# Altium PCB stm32.PcbDoc
Units mil, origin at the board's own origin, x right, y up, seen from the top; angles counter-clockwise.
Board outline 1105 x 2080 mil, 2 copper layers (Top Layer, Bottom Layer); 35 components, 50 nets, 168 pads, 91 vias.
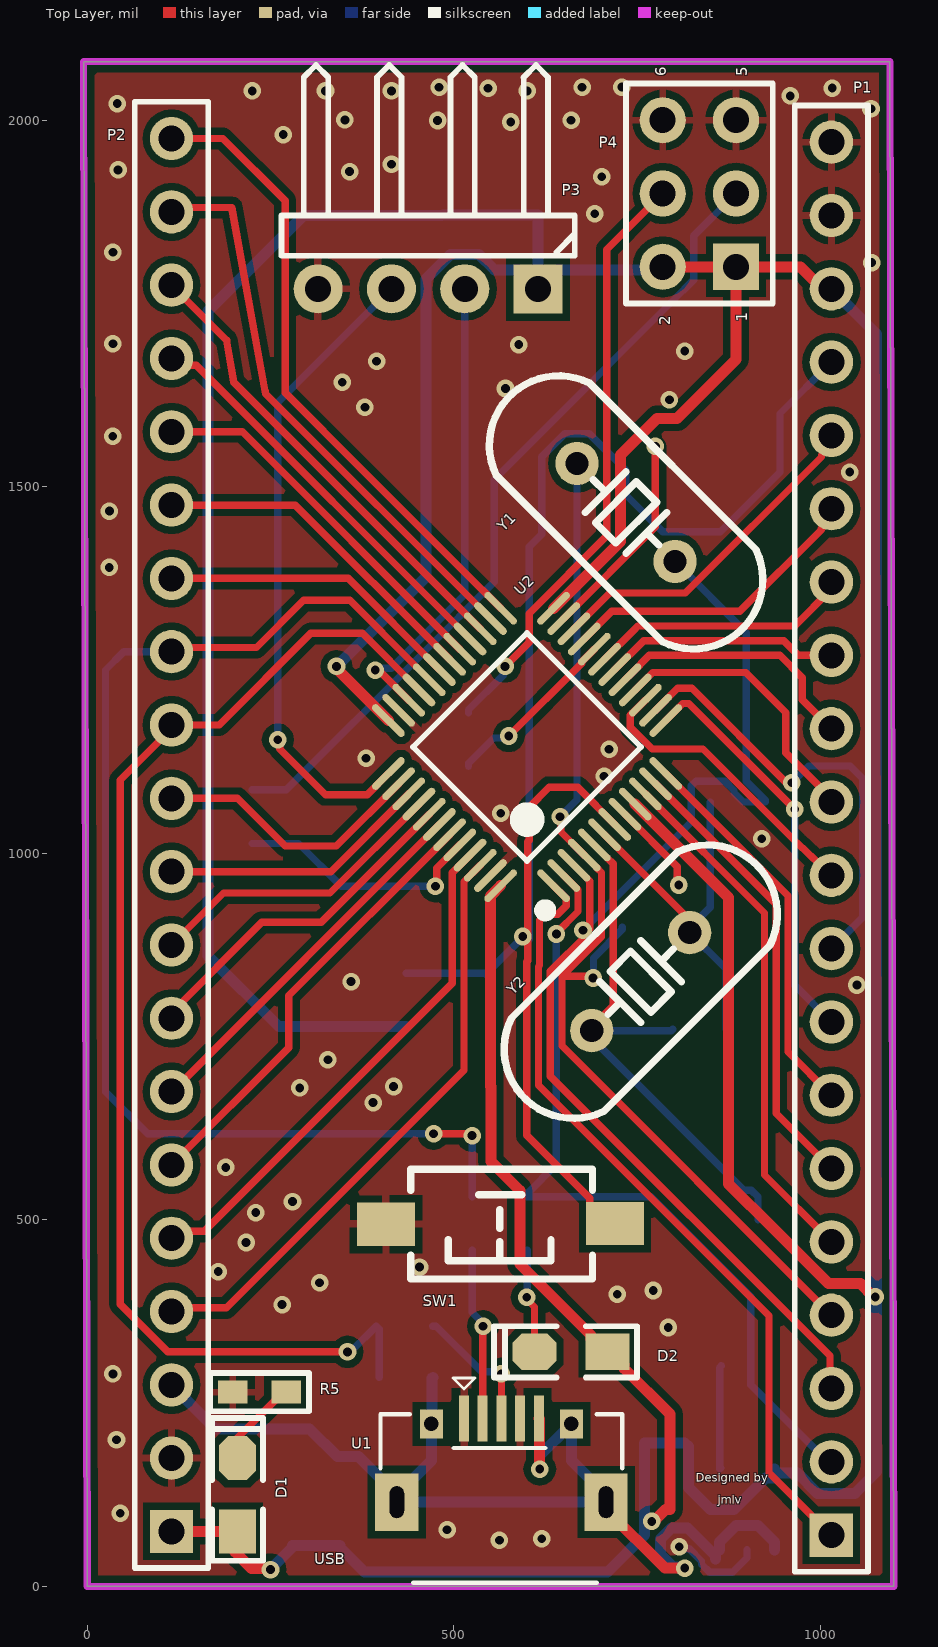
[diagram p0: Top Layer view]
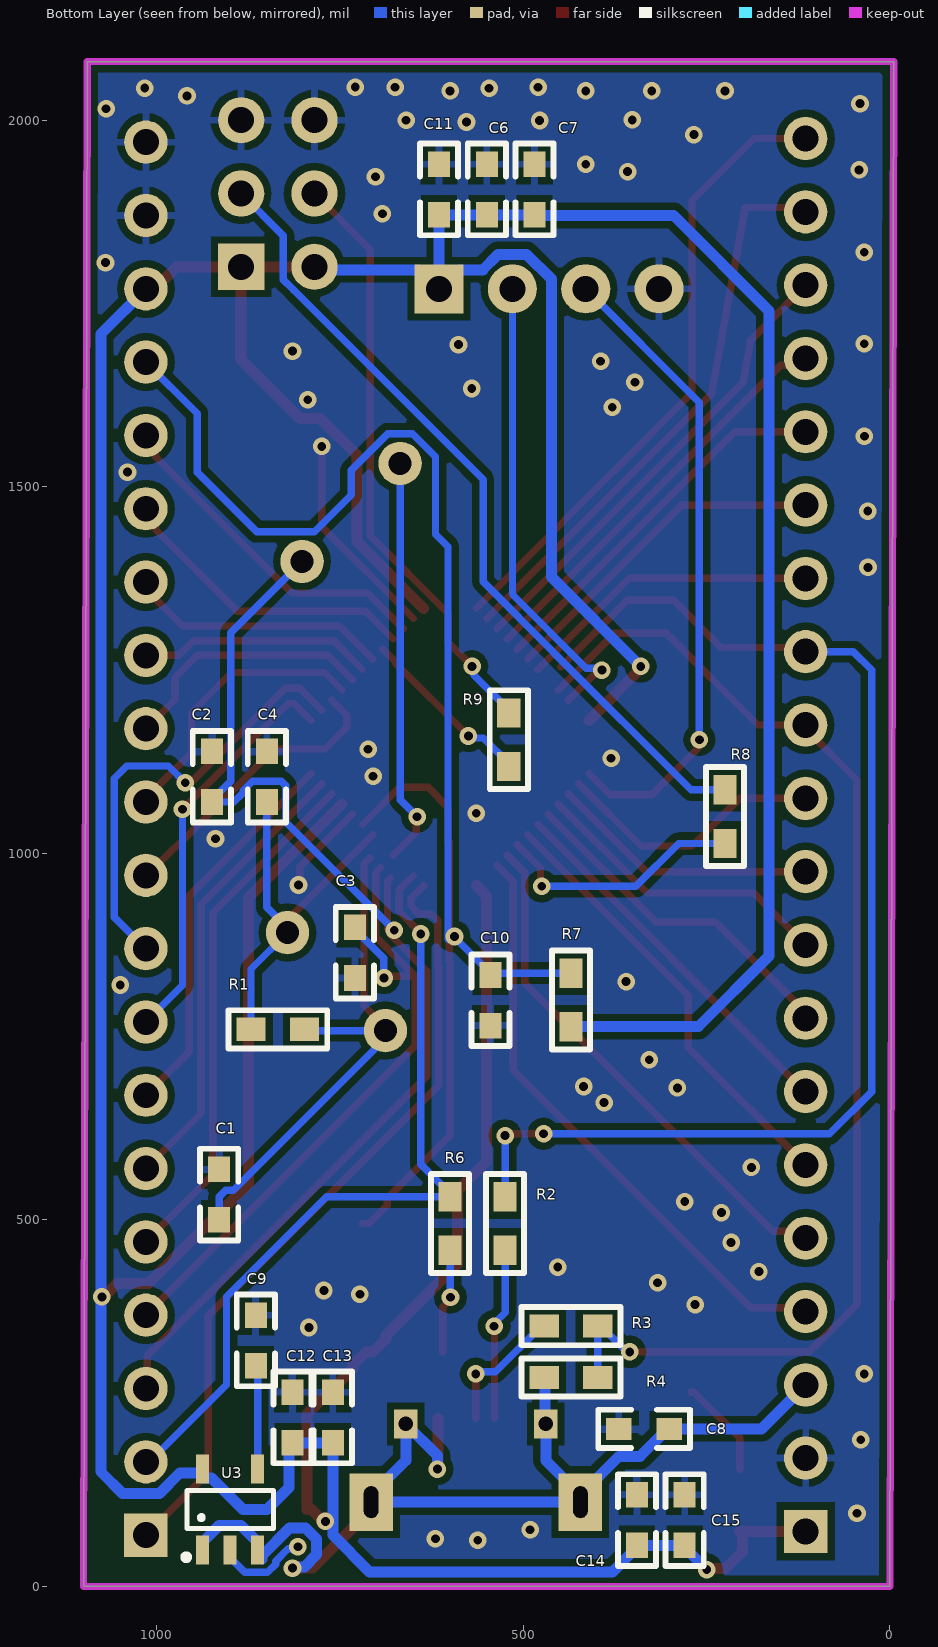
[diagram p1: Bottom Layer view, seen from below]

## Layer stack, top to bottom
Top Solder: solder mask 0.4, Solder Resist, Dk 3.5
Top Layer: signal copper 1.4
Dielectric 1: dielectric 12.6, FR-4, Dk 4.8
Bottom Layer: signal copper 1.4
Bottom Solder: solder mask 0.4, Solder Resist, Dk 3.5

## Board outline
0,0 -5,2080 1095,2080 1100,0

## Design rules (kind name [scope] priority, off if disabled: settings)
Clearance [All] p1: gap=6 ignorepadtopadclearanceinfootprint=FALSE except(10: Arc-Poly Arc-Region Track-Poly Track-Region SMDPad-Poly SMDPad-Region THPad-Poly THPad-Region Via-Poly Via-Region Fill-Region)
MinimumSolderMaskSliver [All] p1: minsoldermaskwidth=1.4
PolygonConnect [All] p1: thpad.connectstyle=Relief thpad.reliefconductorwidth=10 thpad.reliefentries=4 thpad.polygonreliefangle="90 Angle" thpad.airgapwidth=10 smdpad.connectstyle=Relief smdpad.reliefconductorwidth=10 smdpad.reliefentries=4 smdpad.polygonreliefangle="90 Angle" smdpad.airgapwidth=10 via.connectstyle=Direct via.reliefconductorwidth=10 via.reliefentries=4 via.polygonreliefangle="90 Angle" via.airgapwidth=10
RoutingVias [All] p1: holewidth=12 width=24 viastyle="Through Hole" minholewidth=6 minwidth=12 maxholewidth=24 maxwidth=50
SilkToSilkClearance [All] p1: silktosilkclearance=3
SilkToSolderMaskClearance [IsPad] p1: minsilkscreentomaskgap=1.5 clearancetoexposedcopper=TRUE
SolderMaskExpansion [All] p1: expansion=4 istentingtop=FALSE
Width [All] p1: maxlimit=20 minlimit=6 preferedwidth=10
27 further rules are at their usual default settings.

## Components (designator, comment, footprint, x,y, rotation, side; value= is the part's Value field where it differs from the comment)
C1 "22p C0603" "C 0603" 915,535 r90 bottom value=104
C2 "22p C0603" "C 0603" 925,1104 r270 bottom value=104
C3 "22p C0603" "C 0603" 730,865 r90 bottom value=104
C4 "22p C0603" "C 0603" 850,1105 r90 bottom value=104
C6 "105 C0603" "C 0603" 550,1905 r270 bottom value=104
C7 "105 C0603" "C 0603" 485,1905 r270 bottom value=104
C8 "105 C0603" "C 0603" 335,215 r180 bottom value=104
C9 "105 C0603" "C 0603" 865,335 r270 bottom value=104
C10 "105 C0603" "C 0603" 545,800 r90 bottom value=104
C11 "105 C0603" "C 0603" 615,1905 r270 bottom value=104
C12 "105 C0603" "C 0603" 815,230 r270 bottom value=104
C13 "105 C0603" "C 0603" 760,230 r270 bottom value=104
C14 "105 C0603" "C 0603" 345,90 r270 bottom value=104
C15 "105 C0603" "C 0603" 280,90 r270 bottom value=104
D1 "LED" "LED 0805G" 205,125 r90 top
D2 "LED" "LED 0805G" 660,320 r180 top
P1 "Header 20" HDR1X20 1015,70 r90 top
P2 "Header 20" HDR1X20 115,75 r90 top
P3 "SWD" HDR-1X4_H 615,1770 r180 top
P4 "Header 3X2" HDR-3X2 885,1800 r90 top
R1 "1M R0603" "R 0603" 835,760 r180 bottom
R2 "20R R0603" "R 0603" 525,495 r90 bottom
R3 "20R R0603" "R 0603" 435,355 r180 bottom
R4 "4.7K R0603" "R 0603" 435,285 r180 bottom
R5 "10K R0603" "R 0603" 235,265 r180 top
R6 "10K R0603" "R 0603" 600,495 r90 bottom
R7 "10K R0603" "R 0603" 435,800 r270 bottom
R8 "10K R0603" "R 0603" 225,1050 r90 bottom
R9 "10K R0603" "R 0603" 520,1155 r270 bottom
SW1 "SW-PB_V" "TSW SMD-3*6*2.5" 562.69,494.21 r180 top
U1 "USB-mrico" USB-micro_B 565,115 r0 top
U2 "stm32f103c8t6_48pin" "TQFP48 7x7_L" 600,1145 r45 top
U3 "RT9193" SOT23-5L 900,105 r180 bottom
Y1 "32.768K" "XTAL-49S DIP" 735,1465 r315 top
Y2 "8M" "XTAL-49S DIP" 755,825 r225 top

## Footprints (in the part's own frame and the unit in brackets; to place one, negate y for a bottom-side part, rotate by r counter-clockwise, add the part's x,y. Pads: shape width x height; smd on the part's side, far side on the other; paste and mask are expansions set on the pad)
"C 0603" [mil] "无极性贴片电容"
  rect 35x30 smd: 1(-35,0) 2(34,0)
  silkscreen extent -63,-26 62,26, body extent -31,-16 31,16, height 32
HDR1X20 [mm] "Connector; Header; 20 Position"
  rect 1.5x1.5 hole 0.9: 1(0,0)
  round 1.5 hole 0.9: 2(2.54,0) 3(5.08,0) 4(7.62,0) 5(10.16,0) 6(12.7,0) 7(15.24,0) 8(17.78,0) 9(20.32,0) 10(22.86,0) 11(25.4,0) 12(27.94,0) 13(30.48,0) 14(33.02,0) 15(35.56,0) 16(38.1,0) 17(40.64,0) 18(43.18,0) 19(45.72,0) 20(48.26,0)
  silkscreen extent -1.27,-1.27 49.53,1.27
HDR-1X4_H [mm] "弯脚排针，4脚"
  rect 1.7x1.7 hole 0.9: 1(0,0)
  round 1.7 hole 0.9: 2(2.54,0) 3(5.08,0) 4(7.62,0)
  silkscreen extent -1.27,-7.76 8.89,-1.14, body extent -1.27,-7.77 8.89,1.27, height 4.85
HDR-3X2 [mm] "双排排针，3x2脚"
  rect 1.6x1.6 hole 0.9: 1(0,0)
  round 1.6 hole 0.9: 2(0,2.54) 3(2.54,0) 4(2.54,2.54) 5(5.08,0) 6(5.08,2.54)
  silkscreen extent -1.27,-1.27 6.35,3.81, body extent -1.27,-1.27 6.35,3.81, height 8.5
"LED 0805G" [mil] "绿色0805LED"
  rect 60x50 smd: 1(-50,0)
  oct 60x50 smd: 2(50,0)
  silkscreen extent -90,-35 105,35, body extent -39,-25 39,25, height 32
"R 0603" [mil] "1/10W贴片电阻"
  rect 40x31.5 smd: 1(-36.5,0) 2(36.5,0)
  silkscreen extent -68,-26 68,26, body extent -31,-16 31,16, height 16
SOT23-5L [mm] "3x1.6x1.1mm(长宽高)"
  rect 0.45x1 smd: 1(-0.95,-1.4) 2(0,-1.4) 3(0.95,-1.4) 4(0.95,1.4) 5(-0.95,1.4)
  silkscreen extent -1.6,-1.73 1.5,0.66, body extent -1.5,-1.4 1.5,1.4, height 1.15
"TQFP48 7x7_L" [mm] "48脚，体宽：7x7mm, 脚距：0.5mm"
  oval 0.25x1.5 smd: 1(-2.75,-4.046) 2(-2.25,-4.046) 3(-1.75,-4.046) 4(-1.25,-4.046) 5(-0.75,-4.046) 6(-0.25,-4.046) 7(0.25,-4.046) 8(0.75,-4.046) 9(1.25,-4.046) 10(1.75,-4.046) 11(2.25,-4.046) 12(2.75,-4.046) 25(2.75,4.046) 26(2.25,4.046) 27(1.75,4.046) 28(1.25,4.046) 29(0.75,4.046) 30(0.25,4.046) 31(-0.25,4.046) 32(-0.75,4.046) 33(-1.25,4.046) 34(-1.75,4.046) 35(-2.25,4.046) 36(-2.75,4.046)
  oval 1.5x0.25 smd: 13(4.046,-2.75) 14(4.046,-2.25) 15(4.046,-1.75) 16(4.046,-1.25) 17(4.046,-0.75) 18(4.046,-0.25) 19(4.046,0.25) 20(4.046,0.75) 21(4.046,1.25) 22(4.046,1.75) 23(4.046,2.25) 24(4.046,2.75) 37(-4.046,2.75) 38(-4.046,2.25) 39(-4.046,1.75) 40(-4.046,1.25) 41(-4.046,0.75) 42(-4.046,0.25) 43(-4.046,-0.25) 44(-4.046,-0.75) 45(-4.046,-1.25) 46(-4.046,-1.75) 47(-4.046,-2.25) 48(-4.046,-2.75)
  silkscreen extent -3.68,-4.57 2.79,2.79, body extent -4.5,-4.5 4.5,4.5, height 1.05
"TSW SMD-3*6*2.5" [mm] "3*6*2.5mm"
  rect 2x1.5 smd: 1(-3.996,-0.02) 2(3.937,0)
  silkscreen extent -3.21,-1.9 3.09,1.9, body extent -4,-1.88 4,1.62, height 2.59
USB-micro_B [mm] "micro型USB ，5.7*7.8*2.5mm"
  rect 0.35x1.6 smd: 1(-1.3,2.9) 2(-0.65,2.9) 3(0,2.9) 4(0.65,2.9) 5(1.3,2.9)
  rect 1.5x2 hole 0.5 slot 1.1 at 90 deg: 5(-3.625,0) 5(3.625,0)
  rect 0.8x1 hole 0.5: 5(-2.425,2.71) 5(2.425,2.71)
  silkscreen extent -4.19,-2.79 4.19,4.3, body extent -4,-2.71 4,2.89, height 2.8
"XTAL-49S DIP" [mm]
  round 1.5 hole 0.8: 1(-2.4,0) 2(2.4,0)
  silkscreen extent -5.7,-2.28 5.7,2.28, body extent -5.68,-2.35 5.68,2.3, height 3.5

## Part data
C1 C2 C3 C4 C6 C7 C8 C9 C10 C11 C12 C13 C14 C15: library part Cap, LatestRevisionDate=17-Jul-2002, LatestRevisionNote="Re-released for DXP Platform.", Published=8-Jun-2000, Publisher="Altium Limited"
P1 P2: library part "Header1* 20", LatestRevisionDate=17-Jul-2002, LatestRevisionNote="Re-released for DXP Platform.", Publisher="Altium Limited"
P3: library part "Header 1*4", LatestRevisionDate=17-Jul-2002, LatestRevisionNote="Re-released for DXP Platform.", Publisher="Altium Limited"
P4: library part "Header 2*3", LatestRevisionDate=17-Jul-2002, LatestRevisionNote="Re-released for DXP Platform.", Publisher="Altium Limited"
R1 R2 R3 R4 R5 R6 R7 R8 R9: library part Res2, LatestRevisionDate=17-Jul-2002, LatestRevisionNote="Re-released for DXP Platform.", Published=8-Jun-2000, Publisher="Altium Limited"
U1: library part usb-STM
U3: library part RT9193X_5P, ICA_MFR_NAME=RICHTEK, ICA_PARTNUM=$$2191094$$RT9193-15CU5, Part Number=TMP-13
Y1 Y2: library part XTAL, LatestRevisionDate=17-Jul-2002, LatestRevisionNote="Re-released for DXP Platform.", Published=8-Jun-2000, Publisher="Altium Limited"

## Via types
v1: diameter 24, hole 12, Top Layer to Bottom Layer, 91 vias

## Nets (pads, with @x,y where several pads share a name; then routed paths per layer and width w, separated by ;. In a path a pad name is that pad's centre, name@x,y a point inside that pad or via, vN(x,y) a via of type N, cw(c..) or ccw(c..) an arc to the next point about the centre after c; other vN are vias at no path point)
5V: C8.2 P2.3 R4.1 U1.5 U3.1 U3.3 | length 1596.1
  Top Layer w15: U1.5@616.18,229.17 616.72,228.63 616.72,160.64 v1(617.27,160.09) ; U1.5@707.72,115 707.72,105.16 787.87,25 v1(815,25)
  Bottom Layer w15: P2.3@123.5,275 P2.3 175,215 C8.2 303.5,215 341.31,177.19 369.94,177.19 U1.5@422.28,124.84 ; R4.1 470.51,284.01 470.51,222.68 469.53,221.69 469.53,172.09 U1.5@422.28,124.84 ; v1(617.27,160.09) 617.27,178.49 660.47,221.69 660.47,172.09 707.72,124.84 U1.5@707.72,115 ; U1.5@729.74,84.88 707.72,106.91 U1.5@707.72,115 ; v1(815,25) 813.28,26.72 798.86,26.72 782.07,43.5 782.07,64.63 797.01,79.57 819.12,79.57 856.85,41.84 U3.3@856.85,37.7 ; U3.3 862.6,60.71 884.96,83.07 915.04,83.07 937.4,60.71 U3.1 ; U1.5@422.28,124.84 422.28,115 U1.5@707.72,115
BOOT0: R8.1 U2.44 | length 344.4
  Top Layer w10: v1(474.95,955.05) 476.76,956.85 476.76,980 U2.44
  Bottom Layer w10: R8.1 288.11,1013.5 346.56,955.05 v1(474.95,955.05)
BOOT1: R9.2 U2.20 | length 241.6
  Top Layer w10: v1(575,1160) 674.47,1259.47 674.47,1261.23 U2.20
  Bottom Layer w10: R9.2 520,1122.75 554.57,1157.32 572.32,1157.32 v1(575,1160)
GND: C1.2 C2.1 C3.1 C4.2 C6.1 C7.1 C8.1 C9.1 C10.1 C11.1 C12.1 C13.1 C14.1 C15.1 P1.19 P1.20 P2.2 P3.4 P4.5 P4.6 R5.2 SW1.2 U1.1 U1.4 U2.8 U2.23 U2.35 U2.47 U3.2 | length 541.7
  Top Layer w10: U2.23 775,1445.27 v1(775,1555) ; U2.8 805,981.76 805,958.61 v1(806.8,956.8)
  Bottom Layer w10: v1(807.57,54.07) 810.25,51.39 821.14,51.39 838,34.53 838,30.38 849.18,19.2 880.14,19.2 900,39.06 U3.2
  other v1: 562.28,62.96 620,65 490.95,77.38 45,100 40,200 35,290 792.59,353.24 265.83,384.48 723.02,398.68 772.19,403.74 316.95,414.3 178.86,429.42 453.25,435.59 216.71,469.15 230,510 280,525 189.08,571.6 390,660 290,680 417.91,682.01 328.32,718.3 1049.9,820.39 360,825 920,1020 564.22,1054.77 705,1105 380.43,1129.56 711.89,1142.08 30,1390 30.23,1466.8 1040,1520 34.87,1569 378.78,1608.45 794.07,1618.76 570.61,1634.03 348,1642.64 394.74,1671.14 815,1685 588.52,1693.94 35,1695 1070.08,1805.79 35,1820 692.39,1872.37 701.78,1922.84 357.85,1929.88 42.09,1932.23 415,1940 267.46,1980.36 577.64,1997.55 351.5,2000.33 477.99,1999.52 660,2000 1069.16,2015.47 40.91,2022.62 958.85,2033.18 225,2040 325,2040 415,2040 600,2040 546.78,2043.49 1016.37,2043.75 480,2045 675,2045 729.35,2045.17
NetC9_2: C9.2 U3.4 | length 143.9
  Bottom Layer w10: U3.4@864.04,161.56 U3.4 862.6,298.6 C9.2
NetD1_2: D1.2 R5.1 | length 135
  Top Layer w10: D1.2@205,160 205,202.75 267.25,265 R5.1
NetD2_2: D2.2 R6.1 | length 143.1
  Top Layer w10: v1(599.47,394.47) 600,393.94 600,391.21 610,381.21 D2.2
  Bottom Layer w10: v1(599.47,394.47) 600,395 R6.1
NetP4_3: P4.3 R8.2 | length 1114.1
  Bottom Layer w10: R8.2 271.5,1086.5 457.91,1272.91 457.91,1273.23 555,1370.32 555,1510 813.28,1768.28 ; 813.33,1768.23 815.01,1769.91 827.5,1782.4 827.5,1842.5 P4.3
NetP4_4: P4.4 R9.1 | length 818.3
  Top Layer w10: v1(570,1255) 602.76,1287.76 602.76,1327.03 708.71,1432.99 708.71,1823.71 P4.4
  Bottom Layer w10: R9.1 520,1195.75 567.32,1243.07 567.32,1252.32 v1(570,1255)
NetR2_1: R2.1 U1.2 | length 235.8
  Top Layer w10: U1.2 539.41,349.41 540,350 v1(540,355)
  Bottom Layer w10: R2.1 525,373.79 540,358.79 v1(540,355)
NetR3_1: R3.1 U1.3 | length 181.3
  Top Layer w10: U1.3 v1(565,290)
  Bottom Layer w10: R3.1 475.75,355 538.07,292.68 562.32,292.68 v1(565,290)
OSCIN: C1.1 R1.2 U2.5 Y2.2 | length 720.8
  Top Layer w10: Y2.2 688.19,762.73 717.4,791.95 717.4,985.73 U2.5@709.04,994.09
  Bottom Layer w10: R1.2 796.69,758.19 Y2.2 688.19,747.76 895.44,540.5 905.87,540.5 915,531.37 C1.1
OSCOUT: C4.1 R1.1 U2.6 Y2.1 | length 524
  Top Layer w10: U2.6 812.43,918.65 812.43,901.2 Y2.1
  Bottom Layer w10: C4.1 850,926.6 821.81,898.41 Y2.1 871.5,842.13 R1.1
PA0: P1.5 U2.10 | length 716.1
  Top Layer w10: U2.10 923.84,918.59 923.84,561.16 P1.5
PA1: P1.6 U2.11 | length 624.3
  Top Layer w10: U2.11 939.84,930.43 939.84,645.16 P1.6
PA2: P1.7 U2.12 | length 532.5
  Top Layer w10: U2.12 955.84,942.27 955.84,729.16 P1.7
PA3: P1.8 U2.13 | length 555.9
  Top Layer w10: U2.13 812.41,1204.3 820.7,1204.3 v1(965,1060)
  Bottom Layer w10: v1(965,1060) 965,820 P1.8
PA4: P1.9 U2.14 | length 614.8
  Top Layer w10: U2.14 805.27,1225 825,1225 952.32,1097.68 959.85,1097.68 v1(961.26,1096.26)
  Bottom Layer w10: v1(961.26,1096.26) 984.02,1119.02 1040.98,1119.02 1058,1102 1058,913 P1.9
PA5: P1.10 U2.15 | length 402.4
  Top Layer w10: U2.15 740.9,1188.46 740.9,1172.06 770.72,1142.24 840.06,1142.24 968.18,1014.12 968.65,1013.68 968.94,1013.42 P1.10
PA6: P1.11 U2.16 | length 385.8
  Top Layer w10: U2.16 747.55,1222.84 771.43,1246.72 898.28,1246.72 952.81,1192.19 952.81,1137.25 1015,1075.05 P1.11
PA7: P1.12 U2.17 | length 367.1
  Top Layer w10: U2.17@742.64,1245.77 733.63,1236.76 U2.17 742.59,1245.83 766.76,1270 945,1270 975.31,1239.69 975.31,1209.69 P1.12
PA8: P2.16 U2.29 | length 516.1
  Top Layer w10: P2.16 211.76,1575 U2.29
PA9: P2.15 U2.30 | length 466.5
  Top Layer w10: P2.15 283.92,1475 U2.30
PA10: P2.14 U2.31 | length 416.9
  Top Layer w10: P2.14 356.08,1375 U2.31
PA11: P2.13 R2.2 U2.32 | length 1684.5
  Top Layer w10: P2.13 120.86,1280.86 230.86,1280.86 295,1345 358.35,1345 U2.32@449.2,1254.16 ; v1(472.5,617.5) 522.5,617.5 v1(525,615)
  Bottom Layer w10: P2.13 50,1275 25,1250 25,675 82.5,617.5 v1(472.5,617.5) ; R2.2 v1(525,615)
PA12: P2.12 R3.2 R4.2 U2.33 | length 1701.5
  Top Layer w10: v1@350,320 110,320 45,385 45,1100 115,1170 P2.12 180,1175 305,1300 375.4,1300 U2.33
  Bottom Layer w10: v1@357.68,317.32 v1(355,320) 357.68,322.68 361.93,322.68 394.25,355 398.5,350.75 R4.2
PA15: P2.11 U2.38 | length 371.9
  Top Layer w10: P2.11 205,1075 270,1010 339.73,1010 U2.38
PB0: P1.13 U2.18 | length 320
  Top Layer w10: U2.18 758.92,1290 950,1290 970,1270 P1.13
PB1: P1.14 U2.19 | length 353.8
  Top Layer w10: U2.19 746.08,1305 751.08,1310 965,1310 1015,1360 P1.14@1015,1365
PB3: P2.10 U2.39 | length 367.6
  Top Layer w10: P2.10 332.56,975 U2.39
PB4: P2.9 U2.40 | length 417.2
  Top Layer w10: P2.9 185.85,945.85 331.25,945.85 U2.40
PB5: P2.8 U2.41 | length 471.3
  Top Layer w10: P2.8 115,782.73 238.06,905.79 319.03,905.79 U2.41
PB6: P2.7 U2.42 | length 516.3
  Top Layer w10: P2.7 116.08,675 U2.42
PB7: P2.6 U2.43 | length 607.5
  Top Layer w10: P2.6 275,735 275,806.08 U2.43
PB8: P2.5 U2.45 | length 711.8
  Top Layer w10: P2.5 124.39,484.39 159.48,484.39 498,822.9 498,973.29 522.16,997.45 U2.45
PB9: P2.4 U2.46 | length 824.1
  Top Layer w10: P2.4 120,380 190,380 514,704 514,961.56 U2.46
PB10: P1.15 U2.21 | length 419.6
  Top Layer w10: U2.21 715.41,1330.01 890.2,1330.01 1001.11,1440.92 1001.11,1442.83 1015,1456.73 P1.15
PB11: P1.16 U2.22 | length 469.6
  Top Layer w10: U2.22 712.56,1355 815.94,1355 1001.48,1540.54 1001.48,1543.21 1015,1556.73 P1.16
PB12: P2.20 U2.25 | length 874.8
  Top Layer w10: P2.20@120,1970 P2.20 185,1975 270,1890 270,1628.11 375.47,1522.64 378.04,1520.08 512.26,1385.85 U2.25
PB13: P2.19 U2.26 | length 776.5
  Top Layer w10: P2.19 120.86,1880.86 197.31,1880.86 242.7,1630.1 243.25,1627.02 U2.26
PB14: P2.18 U2.27 | length 639.8
  Top Layer w10: P2.18 187.93,1702.07 190.17,1699.82 200.02,1642.42 339.58,1502.85 U2.27
PB15: P2.17 U2.28 | length 565.6
  Top Layer w10: P2.17 124.19,1665.81 148.78,1665.81 U2.28
PC13: P1.2 R6.2 U2.2 | length 1110
  Top Layer w10: v1(640,890) 640,891.21 669.4,920.61 669.4,950.33 U2.2
  Bottom Layer w10: v1(640,890) 640,575.75 600,535.75 R6.2 768.5,531.5 905,395 905,275 1010,170 P1.2
PC14: C2.2 P1.3 U2.3 Y1.2 | length 1627.5
  Top Layer w10: U2.3@681.21,966.25 685.4,962.05 685.4,897.08 v1@683.32,895 ; v1@682.01,889.31 631.66,838.96 631.66,696.03 1013.16,314.53 1013.16,271.84 P1.3
  Bottom Layer w10: v1(676.32,895) 824,1042.68 824,1092.06 830.44,1098.5 869.56,1098.5 882.28,1085.78 882.28,1082.72 895,1070 C2.2 925,1072.5 899,1098.5 899,1301 Y1.2
PC15: C3.2 P1.4 U2.4 Y1.1 | length 1473.5
  Top Layer w10: v1(645,1050) 646.35,1048.65 646.35,1029.05 U2.4 ; v1(690,830) 687.67,832.33 647.66,832.33 ; U2.4@695.13,980.17 701.4,973.89 701.4,886.07 647.66,832.33 ; P1.4 647.66,737.34 647.66,832.33
  Bottom Layer w10: v1(645,1050) 668.19,1073.19 Y1.1 ; v1(690,830) 690.5,830.5 690.5,857 730,896.5 C3.2
RESET: C10.2 P1.17 R7.1 SW1.1 U2.7 | length 2258.5
  Top Layer w10: v1(594,886.52) 596,884.52 v1@601,884.52 ; U2.7 668.92,1090 630,1090 603.04,1063.04 603.04,1018.04 601,1016 v1@601,884.52 ; SW1.1 710.16,495 685.63,519.53 685.63,529.37 599.66,615.34 599.66,852.21 601,853.55 v1@601,884.52
  Bottom Layer w10: R7.1 542.5,836.5 C10.2 545,836.5 v1@588.58,880.08 ; v1@588.58,882.76 589.66,883.84 591.32,883.84 v1(594,886.52) ; v1@599,882.76 602.76,882.76 602.76,1418.07 620,1435.32 620,1540.94 651.4,1572.34 684.97,1572.34 735,1522.31 735,1488.74 785.03,1438.71 863.71,1438.71 945,1520 945,1600 P1.17
SWDCLK: P3.3 U2.37 | length 878.9
  Top Layer w10: v1(260,1155) 262.68,1152.32 262.68,1142.32 325,1080 381.89,1080 U2.37
  Bottom Layer w10: v1(260,1155) 260,1615 P3.3
SWDIO: P3.2 U2.34 | length 640.1
  Top Layer w10: v1(393,1249.88) 395.68,1247.2 400.37,1247.2 U2.34
  Bottom Layer w10: v1(393,1249.88) 395.68,1252.55 414.61,1252.55 515,1352.94 P3.2@515,1765.73
VBAT: P1.1 U2.1 | length 1084
  Top Layer w10: U2.1 653.37,938.52 653.37,928.37 642.01,917.01 625.01,917.01 617,909 617,846.93 615.66,845.59 615.66,683.79 930,369.45 930,155 P1.1
VCC3V3: C6.2 C7.2 C11.2 C12.2 C13.2 C14.2 C15.2 D1.1 D2.1 P1.18 P2.1 P3.1 P4.1 P4.2 R7.2 U2.9 U2.24 U2.36 U2.48 U3.5 | length 8488
  Top Layer w15: P2.1 D1.1 201.5,71.5 201.5,47.34 224.12,24.72 248.28,24.72 v1(250,23) ; v1(340,1255) 340,1251.89 U2.36 ; U2.48 550.17,942.05 550.17,682.12 550.5,681.79 550.5,579.5 590,540 590,440 687.5,342.5 687.5,337.5 705,320 715,320 732.5,302.5 732.5,297.5 795,235 795,105 788.82,105 772.52,88.7 v1(770.08,88.7) ; U2.24 727.21,1425.33 727.21,1543.28 777.2,1593.26 804.63,1593.26 885,1673.63 P4.1 ; U2.9 875,939.6 875,549.15 936.09,488.06 1011.12,413.03 1054.54,413.03 1072.56,395 v1(1075,395) ; P4.2 P4.1 ; P1.18 1003.08,1770 973.08,1800 P4.1
  Bottom Layer w15: P2.1 P2.1@134,56 ; v1(250,23) 250,23.5 280,53.5 C15.2 C14.2 345,53.5 378.5,20 710,20 760,70 v1@760,84.39 ; v1(340,1255) 461.96,1376.96 461.96,1783.38 495.55,1816.96 534.45,1816.96 555.45,1795.96 589.04,1795.96 P3.1 ; R7.2 261.5,763.5 165,860 165,1740 295,1870 484,1870 C7.2 C6.2 C11.2 P3.1 ; v1(770.08,88.7) 767.65,88.7 763.34,84.39 v1@760,84.39 ; P4.2 780.96,1795.96 640.96,1795.96 P3.1 ; U3.5 U3.5@937.4,155.84 ; P1.18 1076.5,1708.5 1076.5,156.5 1046.97,126.97 996.27,126.97 968.76,154.48 938.76,154.48 U3.5@937.4,155.84 ; v1@760,84.39 C13.2 C12.2 820,191 820,135 850,105 882.28,105 925.22,147.93 936.04,147.93 937.4,149.29 U3.5@937.4,155.84

## Polygon pours and split planes (outlines as drawn)
GND on Bottom Layer "GND_L02_P000" (solid, remove dead copper, pour order 0): -5,2080 1095,2080 1095,5 1100,0 0,0 0,2075
GND on Top Layer "GND_L01_P001" (solid, remove dead copper, pour order 1): -5,2080 1095,2080 1095,5 1100,0 0,0 0,2075

## Keep-outs
Keep-Out Layer:
  the board outline again, w10

## Silkscreen, mask and mechanical layers (free items; w line width, h text height)
Top Overlay:
  text "Designed by" at 830,138.5 h20
  text "jmlv" at 860,108.5 h20

## Text inside footprints (layer, text, board x,y; h text height)
P4: Top Overlay "6" at 790,2060 h15 r90; Top Overlay "5" at 900,2060 h15 r90; Top Overlay "2" at 795,1720 h15 r90; Top Overlay "1" at 900,1725 h15 r90
U1: Top Overlay "USB" at 310,30 h15